# EAGLE board buttons+tft_ (EAGLE 9.2.2)
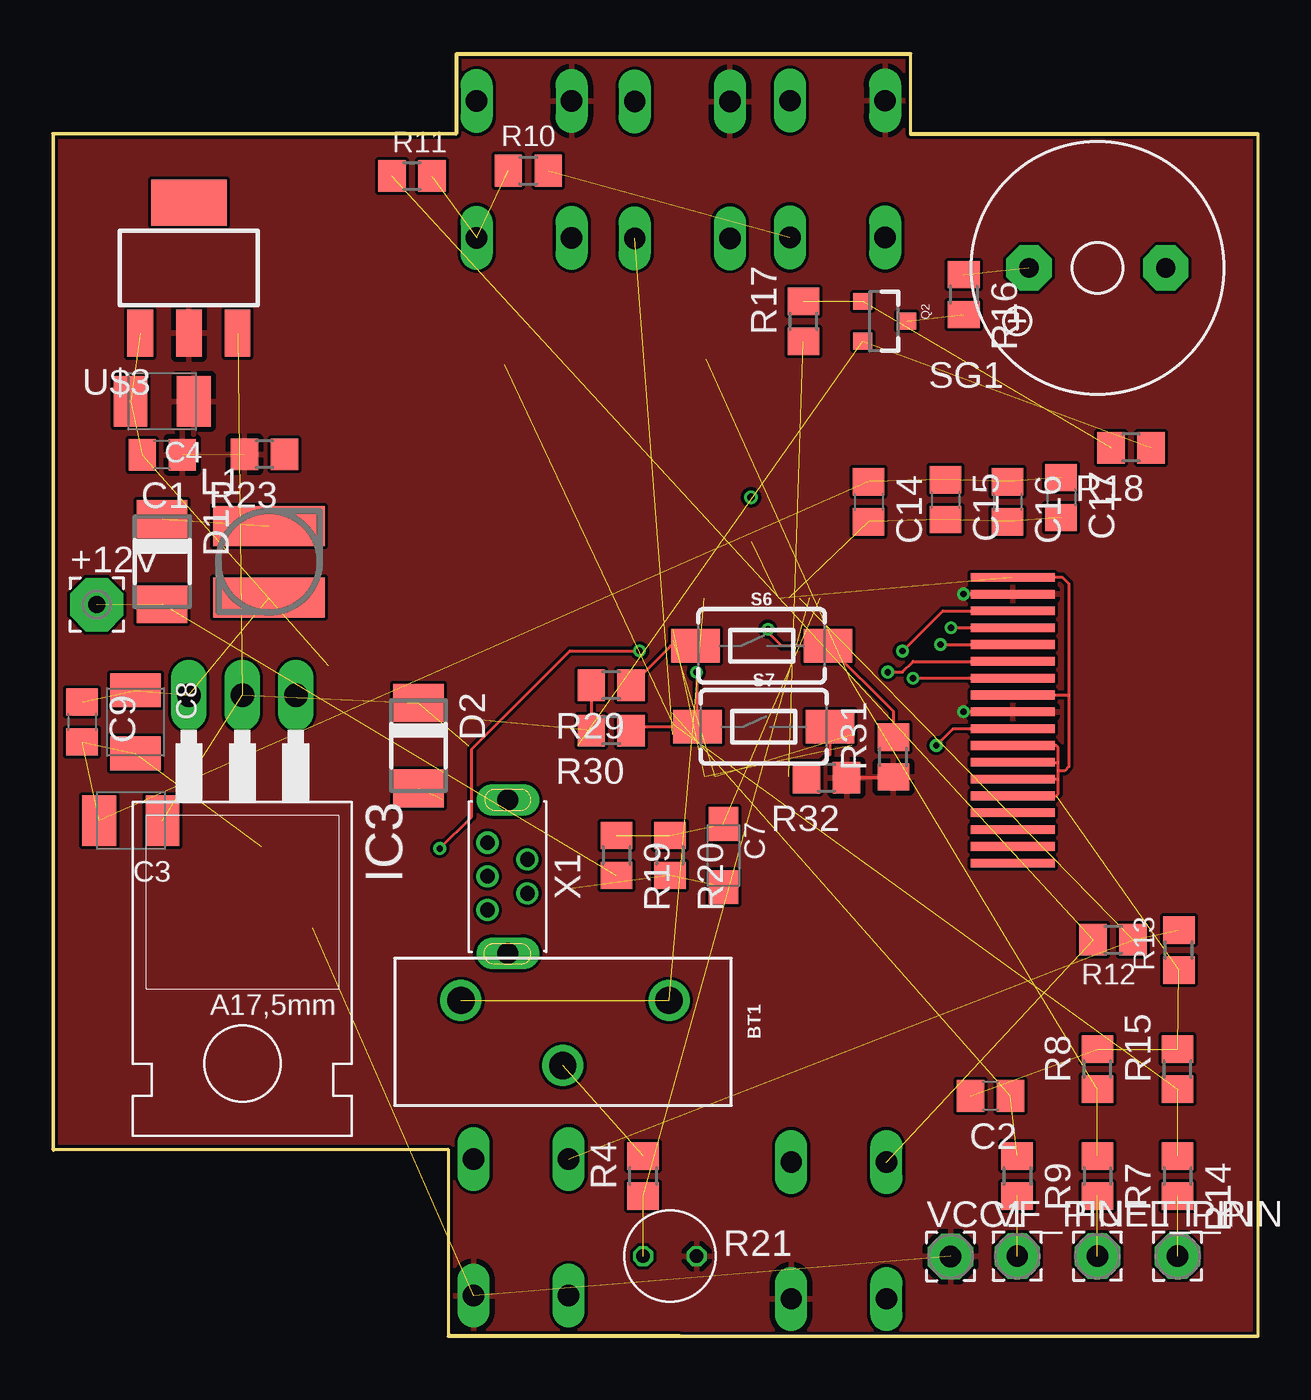
[diagram p0: board, top side]
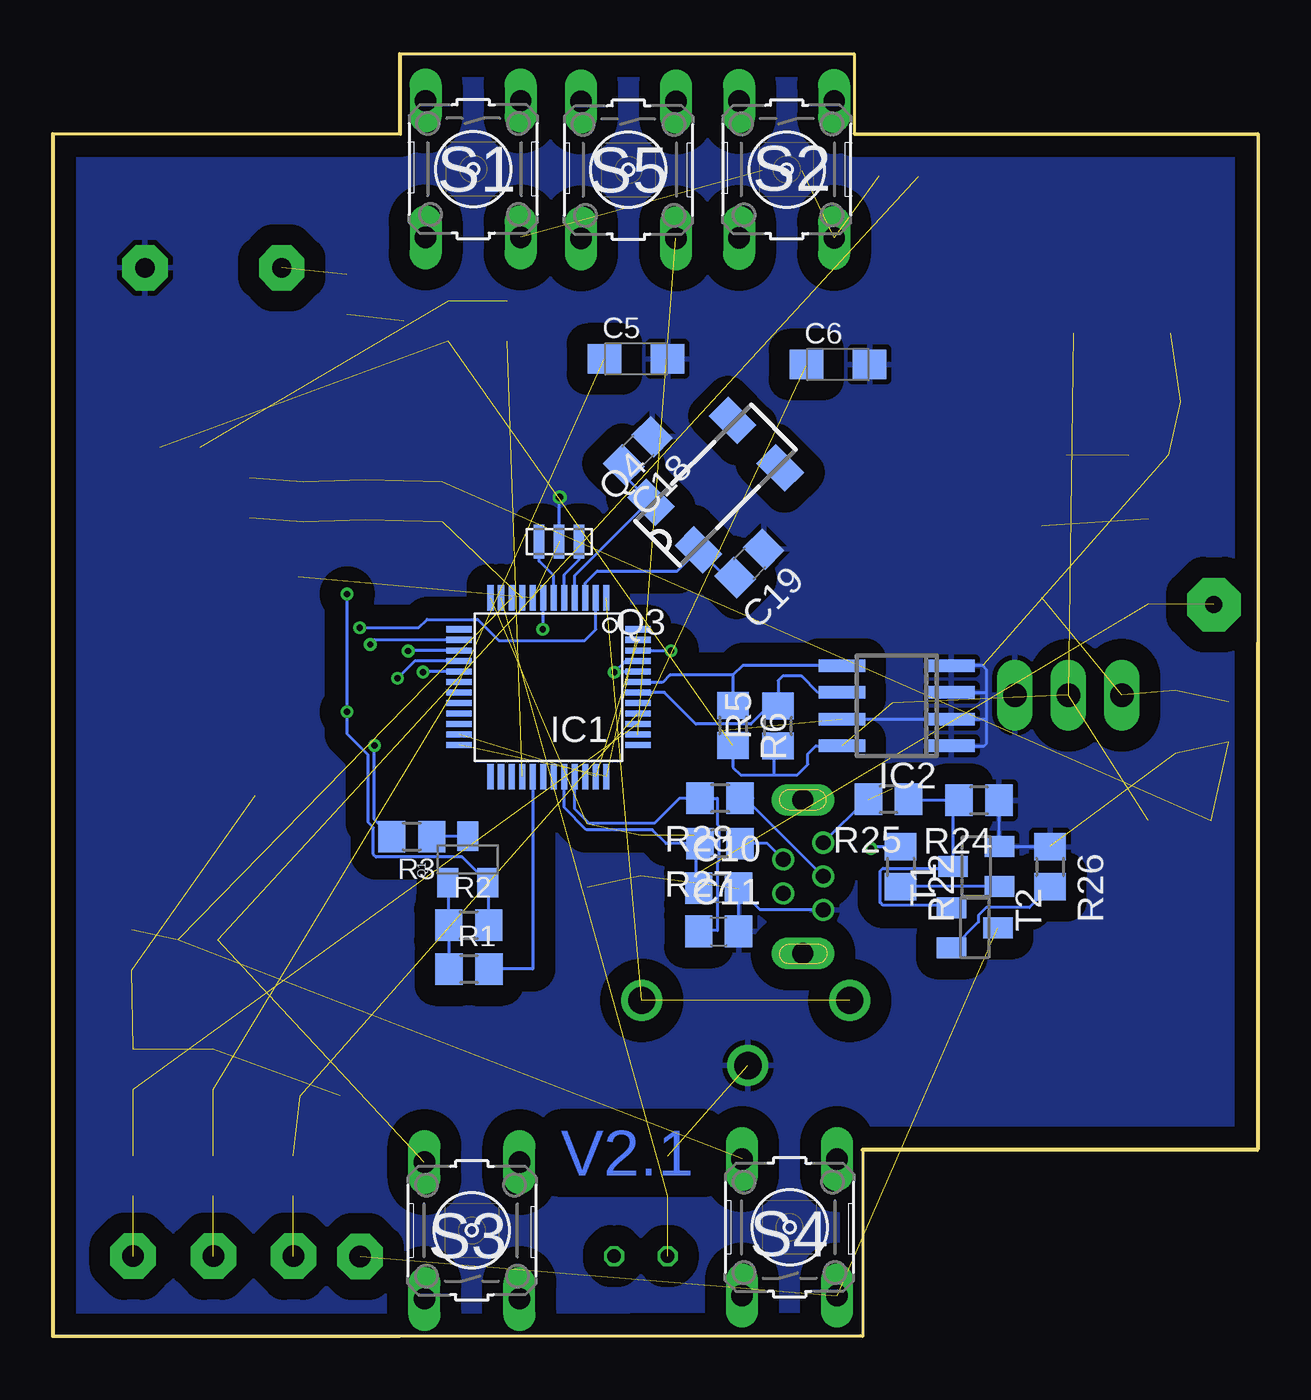
[diagram p1: board, bottom side, seen from below]

Size 57.3 x 61 mm. Coordinates in mm from the lower left corner, seen from the top.
Outline: 18.9,0.05 40.77,0.01 57.28,0.01 57.28,57.16 40.77,57.16 40.77,60.97 19.18,60.97 19.18,57.16 0.02,57.16 0.04,8.85 18.82,8.87
Outline: 18.8,8.9 18.8,0 57.3,0 57.3,57.2 40.8,57.2 40.8,61 19.2,61 19.2,57.2 0,57.2 0,8.9 18.8,8.9
Copper layers (1*16): Top 0.035mm / dielectric 1mm / Bottom 0.035mm
Design rules "default *": minimum track width 6mil, minimum drill 0.3mm, track to track 6mil, track to pad 6mil, pad to pad 6mil, via to via 6mil, smd to smd 6mil, copper to edge 6mil, drill to drill 6mil, minimum pad ring 6mil, minimum via ring 6mil, stop-mask expansion 6mil, vias tented up to drill 0mil, thermal gap 10mil

## Footprints (pad centres in the part's own frame; a part is rotated, then mirrored left to right if it is on the bottom)
2,54/0,8 = drill 0.813 pad 2.54 octagon: 1 0,0
BATTCOM_20MM_VERTICAL = drill 1.3: 1 4.85,-2; 2 -5.04,-2; 3 0.01,1.1
C0805 = smd 1.3 x 1.5: 1 -0.95,0; 2 0.95,0
SMC_B = smd 1.6 x 2.4: + -1.5,0; - 1.5,0
SMC_A = smd 1.6 x 1.4: + -1.5,0; - 1.5,0
DO-214AC = smd 1.8 x 2.4: A 2.025,0; C -2.025,0
2,15/1,0 = drill 1.016 pad 2.159 octagon: 1 0,0
LQFP48 = smd 0.3 x 1.2: 1 -2.75,-4.25; 2 -2.25,-4.25; 3 -1.75,-4.25; 4 -1.25,-4.25; 5 -0.75,-4.25; 6 -0.25,-4.25; 7 0.25,-4.25; 8 0.75,-4.25; 9 1.25,-4.25; 10 1.75,-4.25; 11 2.25,-4.25; 12 2.75,-4.25; 25 2.75,4.25; 26 2.25,4.25; 27 1.75,4.25; 28 1.25,4.25; 29 0.75,4.25; 30 0.25,4.25; 31 -0.25,4.25; 32 -0.75,4.25; 33 -1.25,4.25; 34 -1.75,4.25; 35 -2.25,4.25; 36 -2.75,4.25 | smd 1.2 x 0.3: 13 4.25,-2.75; 14 4.25,-2.25; 15 4.25,-1.75; 16 4.25,-1.25; 17 4.25,-0.75; 18 4.25,-0.25; 19 4.25,0.25; 20 4.25,0.75; 21 4.25,1.25; 22 4.25,1.75; 23 4.25,2.25; 24 4.25,2.75; 37 -4.25,2.75; 38 -4.25,2.25; 39 -4.25,1.75; 40 -4.25,1.25; 41 -4.25,0.75; 42 -4.25,0.25; 43 -4.25,-0.25; 44 -4.25,-0.75; 45 -4.25,-1.25; 46 -4.25,-1.75; 47 -4.25,-2.25; 48 -4.25,-2.75
SO-08 = smd 0.6 x 2.2: 1 -1.905,-2.6; 2 -0.635,-2.6; 3 0.635,-2.6; 4 1.905,-2.6; 5 1.905,2.6; 6 0.635,2.6; 7 -0.635,2.6; 8 -1.905,2.6
TO220 = drill 1.118 long: 1 -2.54,-6.35; 2 0,-6.35; 3 2.54,-6.35
INDUCTOR_CDRH4 = smd 5.3 x 1.9: 1 0,1.7; 2 0,-1.7
SOT23-BEC = smd 1 x 1.4: B -0.95,-1.1; C 0,1.1; E 0.95,-1.1
SOT23-3 = smd 0.8 x 0.9: 1 -0.95,-1; 2 0.95,-1; 3 0,1.1
RESONATOR_MURATA2 = smd 0.5 x 1.6: 1 -0.95,0; 2 0,0; 3 0.95,0
MC-306 = smd 1.3 x 1.9: 1 -2.75,-1.6; 2 2.75,-1.6; 3 2.75,1.6; 4 -2.75,1.6
R0805 = smd 1.3 x 1.5: 1 -0.95,0; 2 0.95,0
PDV-P9XXX = drill 0.635 octagon: 1 -1.27,0; 2 1.27,0
B3F-10XX = drill 1.016 long: 1 -3.251,2.261; 2 3.251,2.261; 3 -3.251,-2.261; 4 3.251,-2.261
TACTILE_SWITCH_SMD_6.0X3.5MM = smd 2.3 x 1.6: 1 -3.15,0; 2 3.15,0
F/QMBIII = drill 0.914 pad 2.159 octagon: + 3.251,0; - -3.251,0
SOT23 = smd 1 x 1.4: 1 -0.95,-1.1; 2 0.95,-1.1; 3 0,1.1
TJC-024-9341 = smd 4 x 0.406: CS 0.8,3.2; D/C 0.8,4; GND1 0.8,6.4; GND2 0.8,0.8; LED_GND1 0.8,-1.6; LED_GND2 0.8,-2.4; LED_GND3 0.8,-3.2; LED_GND4 0.8,-4; LED_VCC 0.8,-0.8; MISO 0.8,1.6; MOSI 0.8,2.4; RESET 0.8,5.6; SCK 0.8,4.8; VCC 0.8,0; XL 0.8,-4.8; XR 0.8,-6.4; YD 0.8,-7.2; YU 0.8,-5.6
SOT223 = smd 1.219 x 2.235: 1 -2.311,-3.099; 2 0,-3.099; 3 2.311,-3.099 | smd 3.6 x 2.2: TAB 0,3.099
USB-MINI_TH-VERTICAL = drill 0.7: D+ -0.16,-1.27; D- -0.96,0.63; GND 1.44,-1.27; ID 0.65,0.63; VBUS -1.76,-1.27 | drill 1 pad 1.5 long: P$1 -3.8,-0.3; P$2 3.5,-0.3

## Placement (x,y rotation side)
+12V  12V  [2,54/0,8]  2.1,34.8 0 top
BT1  [BATTCOM_20MM_VERTICAL]  24.26,13.98 180 top
C1  0.1  [C0805]  5.21,41.92 180 top
C2  3.3nF  [C0805]  44.58,11.44 180 top
C3  100uF  [SMC_B]  3.72,24.53 180 top
C4  100uF  [SMC_B]  5.21,44.46 180 top
C5  10uF  [SMC_A]  29.57,46.48 0 bottom
C6  10uF  [SMC_A]  19.97,46.22 0 bottom
C7  10uF  [SMC_A]  31.88,22.87 270 top
C8  220uF  [SMC_B]  3.94,29.22 270 top
C9  0.1  [C0805]  1.4,29.22 270 top
C10  0.1  [C0805]  25.64,21.31 0 bottom
C11  0.1  [C0805]  25.64,19.26 0 bottom
C14  0.1  [C0805]  38.79,39.69 270 top
C15  0.1  [C0805]  42.44,39.79 270 top
C16  0.1  [C0805]  45.39,39.69 270 top
C17  0.1  [C0805]  47.94,39.89 270 top
C18  0.1  [C0805]  29.48,42.11 225 bottom
C19  0.1  [C0805]  24.18,36.76 225 bottom
D1  [DO-214AC]  5.21,36.84 270 top
D2  [DO-214AC]  17.39,28.09 270 top
FUEL_PIN  [2,15/1,0]  49.66,3.82 0 top
IC1  STM32F103CBT  [LQFP48]  33.73,30.87 180 bottom
IC2  24C04ASN  [SO-08]  17.18,29.99 90 bottom
IC3  LM1117T-5.0  [TO220]  9.02,24.14 180 top
L1  [INDUCTOR_CDRH4]  10.29,36.84 0 top
Q1  PMBT3906  [SOT23-BEC]  37.57,22.68 0 bottom
Q2  MMBT4403  [SOT23-3]  39.5,48.27 270 top
Q3  [RESONATOR_MURATA2]  33.22,37.8 180 bottom
Q4  MC-306  [MC-306]  25.79,40.48 45 bottom
R1  1K  [R0805]  37.51,17.47 180 bottom
R2  10K  [R0805]  37.52,19.56 0 bottom
R3  10  [R0805]  40.23,23.77 0 bottom
R4  33K  [R0805]  28.07,7.63 90 top
R5  4.7K  [R0805]  22.82,29.03 90 bottom
R6  4.7K  [R0805]  24.96,29.05 270 bottom
R7  5.6K  [R0805]  49.66,7.63 270 top
R8  1.5K  [R0805]  49.66,12.71 90 top
R9  10K  [R0805]  45.85,7.63 270 top
R10  20K  [R0805]  22.61,55.43 0 top
R11  6.8K  [R0805]  17.08,55.18 0 top
R12  3.3K  [R0805]  50.41,18.86 180 top
R13  10K  [R0805]  53.53,18.37 90 top
R14  5.6K  [R0805]  53.47,7.63 270 top
R15  1.5K  [R0805]  53.47,12.71 90 top
R16  100  [R0805]  43.31,49.54 270 top
R17  1K  [R0805]  35.69,48.27 90 top
R18  10K  [R0805]  51.26,42.26 180 top
R19  5.6K  [R0805]  26.8,22.87 270 top
R20  1K  [R0805]  29.34,22.87 270 top
R21  PHOTORESPDV-P9  [PDV-P9XXX]  29.34,3.82 0 top
R22  10K  [R0805]  16.99,22.33 270 bottom
R23  10K  [R0805]  10.07,41.94 180 top
R24  10K  [R0805]  13.27,25.49 180 bottom
R25  10K  [R0805]  17.57,25.54 180 bottom
R26  10K  [R0805]  9.89,22.33 270 bottom
R27  10K  [R0805]  25.57,23.44 180 bottom
R28  10K  [R0805]  25.57,25.59 180 bottom
R29  10K  [R0805]  26.55,30.96 180 top
R30  10K  [R0805]  26.55,28.81 180 top
R31  10K  [R0805]  39.96,27.55 90 top
R32  10K  [R0805]  36.79,26.56 180 top
S1  [B3F-10XX]  37.31,55.51 270 bottom
S2  [B3F-10XX]  22.41,55.49 270 bottom
S3  [B3F-10XX]  37.37,5.04 90 bottom
S4  [B3F-10XX]  22.27,5.19 90 bottom
S5  [B3F-10XX]  29.93,55.47 270 bottom
S6  MOMENTARY-SWITCH-SPST-SMD-6.0X3.5MM  [TACTILE_SWITCH_SMD_6.0X3.5MM]  33.7,32.84 0 top
S7  MOMENTARY-SWITCH-SPST-SMD-6.0X3.5MM  [TACTILE_SWITCH_SMD_6.0X3.5MM]  33.8,28.99 0 top
SG1  F/QMBIII  [F/QMBIII]  49.66,50.81 180 top
T1  BC846  [SOT23]  13.4,22.35 90 bottom
T2  BC846  [SOT23]  13.47,19.43 270 bottom
TT_PIN  [2,15/1,0]  53.47,3.82 0 top
U$1  [TJC-024-9341]  44.83,29.7 0 top
U$3  LM1117MPX-3.3  [SOT223]  6.48,50.81 0 top
VCC1  [2,15/1,0]  42.68,3.8 0 top
VF_PIN  [2,15/1,0]  45.85,3.82 0 top
X1  USB-MINI-TH-VERTICAL  [USB-MINI_TH-VERTICAL]  21.94,21.72 270 top

## Library data of the parts
+12V TT_PIN VCC1 VF_PIN = wirepad
BT1 = SparkFun-Batteries
C1-C4 C8-C11 C14-C19 = rcl; SPICEPREFIX: C
C5-C7 R1-R20 R22-R32 = resistor
D1 D2 = diode
FUEL_PIN = wirepad; SPICEPREFIX: X
IC1 = micro-stm_v3
IC2 = microchip; OC_FARNELL: unknown; OC_NEWARK: unknown
IC3 U$3 = lm1117
L1 Q3 = m-pad-2.1
Q1 = transistor-pnp
Q2 = User-Submitted; PROD_ID: TRANS-09245
Q4 = crystal; MPN: MC-306 60.0KHZ 100PPM ,12.5PF; OC_FARNELL: 1278040; OC_NEWARK: 31M5576
R21 = my_mixed
S1-S5 = switch-omron; MPN: B3F-1000; OC_FARNELL: 176432; OC_NEWARK: 36M3542
S6 S7 = SparkFun-Switches; PROD_ID: SWCH-00815; SF_SKU: COM-08229
SG1 = buzzer; OC_FARNELL: unknown; OC_NEWARK: unknown
T1 T2 = transistor-neu-to92
U$1 = diy-modules
X1 = kanflo

## Nets
+5V: C3.+ D2.C IC2.8 IC3.2 Q2.2 R5.1 R6.2 R18.1 U$3.3
+12V: +12V.1 D1.A R19.2
BUT1: R10.2 S1.2
BUT2: R10.1 R11.2 S2.2
BUT3: R11.1 R12.2 S3.2
BUT_PIN: IC1.10 R12.1 R13.2 S4.2
FUEL_PIN: FUEL_PIN.1 R7.2
FUEL_PIN1: C5.+ IC1.18 R7.1 R8.1
GND: BT1.3 C1.2 C2.2 C3.- C4.- C5.- C6.- C7.- C8.- C9.2 C10.2 C11.2 C14.1 C15.1 C16.1 C17.1 C18.1 C19.1 IC1.8 IC2.1 IC2.2 IC2.3 IC2.4 IC2.7 IC3.1 Q3.2 R4.2 R8.2 R13.1 R15.2 R20.2 R24.1 R26.1 R29.2 R30.2 SG1.- T1.2 U$1.GND1 U$1.GND2 U$1.LED_GND1 U$1.LED_GND2 U$1.LED_GND3 U$1.LED_GND4 U$3.1 X1.GND
LED: Q1.C R3.2
N$1: IC1.38 S5.2
N$2: IC1.42 IC2.6 R5.2
N$3: Q1.B R1.2 R2.1
N$4: IC1.17 U$1.MOSI
N$5: IC1.16 U$1.MISO
N$6: IC1.15 U$1.SCK
N$7: C8.+ C9.1 IC3.3 L1.2
N$8: IC1.14 U$1.CS
N$9: IC1.2 U$1.D/C
N$10: D1.C L1.1
N$11: C14.2 C15.2 C16.2 C17.2 IC1.9
N$12: R24.2 R25.1 T1.3 T2.1
N$13: IC1.28 R17.1
N$14: R22.2 T1.1
N$15: Q2.1 R17.2 R18.2
N$16: Q2.3 R16.2
N$17: R16.1 SG1.+
N$18: IC1.29 R1.1
N$19: R3.1 U$1.LED_VCC
N$20: IC1.43 IC2.5 R6.1
N$21: R26.2 T2.2
N$22: C11.1 IC1.33 R28.2
N$23: C7.+ IC1.12 R19.1 R20.1
N$24: C10.1 IC1.32 R27.2
N$25: R28.1 X1.D+
N$26: R27.1 X1.D-
N$27: IC1.46 R22.1
N$28: IC1.5 Q3.1
N$29: IC1.6 Q3.3
N$30: R29.1 S6.1
N$31: IC1.7 R31.2 S6.2
N$32: IC1.44 IC1.45 R30.1 S7.1
N$33: R32.2 S7.2
N$34: C18.2 IC1.4 Q4.4
N$35: C19.2 IC1.3 Q4.1
N$36: R23.1
PHOTORE_PIN: IC1.11 R4.1 R21.1
TT_PIN1: R14.2 TT_PIN.1
TT_PIN_2: C6.+ IC1.39 R14.1 R15.1
USB+5V: D2.A R25.2 X1.VBUS
VBAT1: BT1.1 BT1.2 IC1.1
VCC: C1.1 C4.+ Q1.E R2.2 R21.2 R23.2 R31.1 R32.1 S1.3 S2.3 S3.3 S4.3 S5.3 T2.3 U$1.RESET U$1.VCC U$3.2 VCC1.1
VDD: IC1.24 IC1.36 IC1.48
VF_PIN: C2.1 IC1.40 R9.1
VF_PIN1: R9.2 VF_PIN.1
VSS: IC1.23 IC1.35 IC1.47

## Tracks (layer width: path | path; a pad name or v marks a point on that pad's centre or on a via)
+5V  (6 unrouted)
  Bottom 0.152: R6.2 24.96,27.06 24.6,26.7 23,26.7 | 23,26.7 23,27.9 R5.1 | 23,26.7 21.9,26.7 21.4,27.2 21.4,27.7 21.02,28.09 IC2.8
+12V  (2 unrouted)
BUT1  (1 unrouted)
BUT2  (2 unrouted)
BUT3  (2 unrouted)
BUT_PIN  (3 unrouted)
FUEL_PIN  (1 unrouted)
FUEL_PIN1  (3 unrouted)
GND  (via drill 0.35)  (20 unrouted)
  Top 0.152: U$1.GND1 48,36.1 48.3,35.8 48.3,30.5 | 48.3,30.5 48.3,27.1 48.1,26.9 47.8,26.9 | U$1.LED_GND4 47.7,25.7 47.8,25.8 47.8,26.5 | 47.8,26.5 47.8,26.9 | 47.8,26.9 47.8,27.3 | 47.8,27.3 47.8,28 47.7,28.1 U$1.LED_GND1 | U$1.LED_GND2 47.8,27.3 | U$1.LED_GND3 47.8,26.5 | U$1.GND2 48.3,30.5 | R29.2 R30.2
  Bottom 0.152: IC2.7 IC2.2 12.95,29.35 12.9,29.3 | IC2.1 13.02,28.09 12.9,28.2 12.9,29.3 | 12.9,29.3 12.9,30.7 | 12.9,30.7 12.9,31.7 13.1,31.9 IC2.4 | IC2.3 12.97,30.62 12.9,30.7 | X1.GND 20.69,20.3 23.68,20.3 C10.2 C11.2 | R24.1 12.32,23.32 T1.2 9.91,23.3 R26.1 | Q3.2 33.22,39.88 v33.2,39.9
  pour Bottom (isolate 1): 57.28,57.16 40.77,57.16 40.77,60.97 19.18,60.97 19.18,57.16 0.33,57.16 0.33,8.9 19.18,8.9 19.18,0.01 57.28,0.01
LED
  Bottom 0.152: Q1.C R3.2
N$1  (1 unrouted)
N$2
  Bottom 0.152: 19.8,30.6 IC2.6 20.92,30.62 21.7,31.4 22.6,31.4 22.82,31.18 R5.2 23.26,29.98 24.11,29.12 26.72,29.12 28.22,30.62 IC1.42
N$3
  Bottom 0.152: R1.2 R2.1 38.47,21.53 Q1.B
N$4  (via drill 0.3)
  Top 0.152: v39.7,31.59 40.39,31.59 40.9,32.1 U$1.MOSI
  Bottom 0.152: IC1.17 39.68,31.62 v39.7,31.6 v39.7,31.59
N$5  (via drill 0.3)
  Top 0.152: v40.9,31.3 U$1.MISO
  Bottom 0.152: IC1.16 40.08,32.12 v40.9,31.3
N$6  (via drill 0.3)
  Top 0.152: v40.4,32.59 42.31,34.5 U$1.SCK
  Bottom 0.152: IC1.15 40.4,32.62 v40.4,32.59
N$7  (3 unrouted)
N$8  (via drill 0.3)
  Top 0.152: v42.2,32.9 U$1.CS
  Bottom 0.152: IC1.14 42.2,33.12 v42.2,32.9
N$9  (via drill 0.3)
  Top 0.152: v42.7,33.7 U$1.D/C
  Bottom 0.152: v42.7,33.7 39.9,33.7 39.5,34.1 37.1,34.1 36.1,33.1 32,33.1 31.48,33.62 IC1.2
N$10  (1 unrouted)
N$11  (4 unrouted)
N$12
  Bottom 0.152: T2.1 14.69,20.5 17.83,20.5 17.97,20.63 17.97,22.12 17.83,22.26 14.59,22.26 T1.3 14.5,25.21 R24.2 16.57,25.49 R25.1
N$13  (1 unrouted)
N$14
  Bottom 0.152: T1.1 16.97,21.4 R22.2
N$15  (2 unrouted)
N$16  (1 unrouted)
N$17  (1 unrouted)
N$18
  Bottom 0.152: IC1.29 34.48,17.47 R1.1
N$19  (via drill 0.3)
  Top 0.152: v42,28.1 42.8,28.9 U$1.LED_VCC
  Bottom 0.152: R3.1 42,24.59 v42,28.1
N$20
  Bottom 0.152: IC2.5 24.5,31.9 24.96,31.44 | 24.96,31.44 R6.1 | 24.96,31.44 27.96,31.44 28.3,31.1 29.46,31.1 IC1.43
N$21
  Bottom 0.152: R26.2 10.87,20.4 12.92,20.4 13.3,20.02 13.3,19.7 14.52,18.48 T2.2
N$22
  Bottom 0.152: IC1.33 32.48,25.08 31.8,24.4 28.7,24.4 27.51,25.59 R28.2 25.71,25.59 25.7,25.6 25.7,24.34 25.64,24.28 25.64,22.59 25.7,22.54 25.7,19.3 26.55,19.3 C11.1
N$23  (3 unrouted)
N$24
  Bottom 0.152: R27.2 26.7,23.44 | 26.7,23.44 28.14,23.44 28.8,24.09 31.93,24.09 32.98,25.15 IC1.32 | C10.1 26.7,21.42 26.7,23.44
N$25
  Bottom 0.152: 24.01,25.59 R28.1 24.5,25.71 X1.D+
N$26
  Bottom 0.152: 24.26,23.08 R27.1 23.33,23.44 X1.D-
N$27  (via drill 0.3)
  Top 0.152: v18.4,23.2 19.91,24.71 19.91,27.92 24.59,32.6 v27.9,32.6
  Bottom 0.152: R22.1 18.32,23.28 v18.4,23.2 | v27.9,32.6 29.46,32.6 IC1.46
N$28
  Bottom 0.152: IC1.5 32.98,36.22 32.27,36.93 Q3.1
N$29
  Bottom 0.152: IC1.6 33.48,36.18 34.17,36.87 Q3.3
N$30
  Top 0.152: S6.1 29.38,32.84 R29.1
N$31  (via drill 0.3)
  Top 0.152: R31.2 39.96,29.73 S6.2 34.66,32.84 34,33.5 v34,33.63
  Bottom 0.152: v34,33.63 33.98,33.65 IC1.7
N$32  (via drill 0.3)
  Top 0.152: R30.1 27.68,28.99 S7.1 30.65,31.55 v30.6,31.6 v30.6,31.59
  Bottom 0.152: IC1.44 30.56,31.62 v30.6,31.59 30.06,32.12 IC1.45
N$33
  Top 0.152: S7.2 36.95,27.67 R32.2
N$34
  Bottom 0.152: Q4.4 28.87,39.8 | 28.87,39.8 28.87,40.35 | 29.1,40.02 Q4.4 | IC1.4 32.48,36.19 28.87,39.8 | Q4.4 30.15,40.95 C18.2
N$35
  Bottom 0.152: Q4.1 26.94,37.55 | Q4.1 25.29,36.09 C19.2 | IC1.3 31.98,35.82 31.4,36.4 27.61,36.4 Q4.1
PHOTORE_PIN  (2 unrouted)
TT_PIN1  (1 unrouted)
TT_PIN_2  (3 unrouted)
USB+5V  (1 unrouted)
  Bottom 0.152: R25.2 18.61,25.54 X1.VBUS
VBAT1  (2 unrouted)
VCC  (via drill 0.3)  (3 unrouted)
  Top 0.152: U$1.VCC v43.3,29.7 | v43.3,35.3 U$1.RESET | R31.1 39.92,26.56 R32.1
  Bottom 0.152: v43.3,35.3 v43.3,29.7 43.3,28.65 42.3,27.65 42.3,24.45 42.06,24.2 42.06,22.92 41.92,22.79 37.83,22.79 Q1.E 36.57,21.53 R2.2
  pour Top: 57.28,57.16 40.77,57.16 40.77,60.97 19.18,60.97 19.18,57.16 -0.47,57.16 -0.47,8.9 18.8,8.9 18.8,0.1 18.9,0 57.27,0 57.28,0.01
VDD  (2 unrouted)
VF_PIN  (2 unrouted)
VF_PIN1  (1 unrouted)
VSS  (2 unrouted)

## Text on the board
Top: V2.1
Bottom: V2.1